# Altium PCB mega_board_version_1.PcbDoc
Units mm, origin at the board's own origin, x right, y up, seen from the top; angles counter-clockwise.
Board outline 90 x 100 mm, 2 copper layers (Top Layer, Bottom Layer); 14 components, 68 nets, 204 pads, 33 vias.
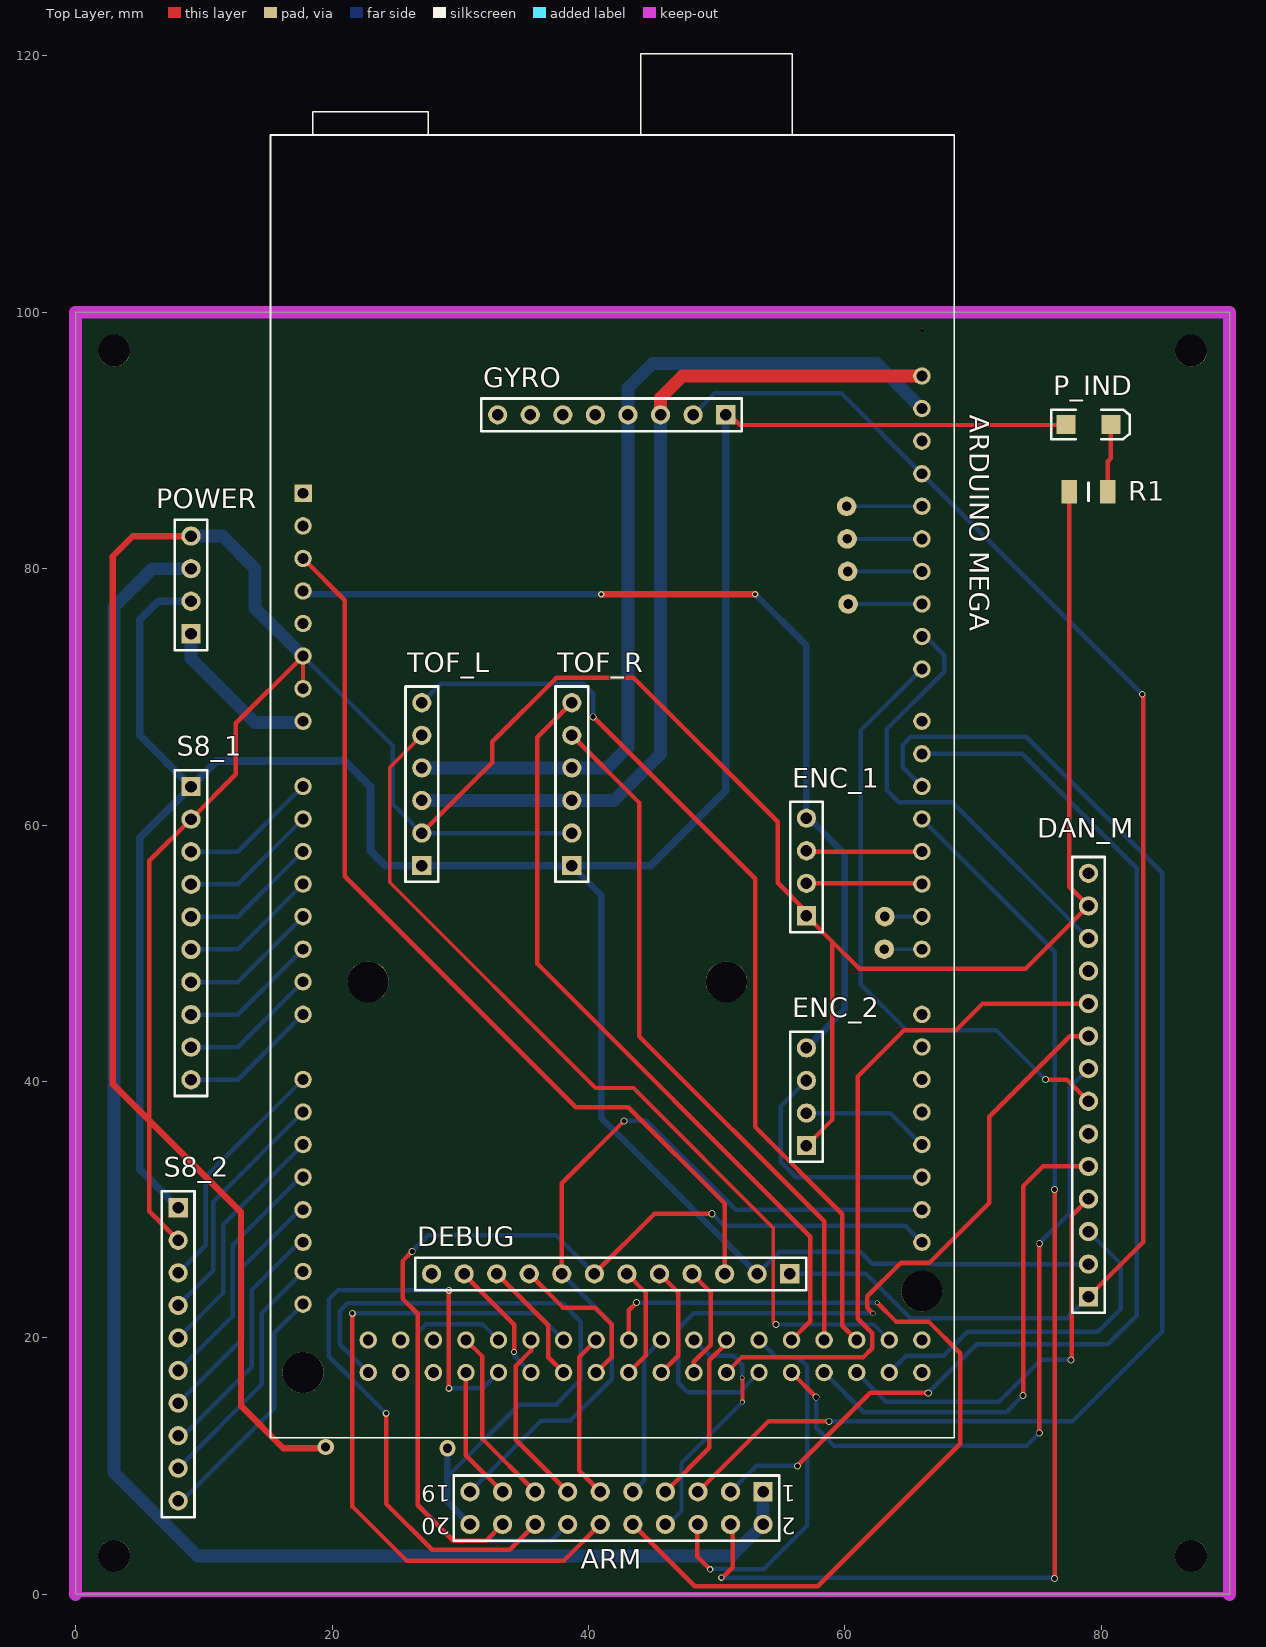
[diagram p0: Top Layer view]
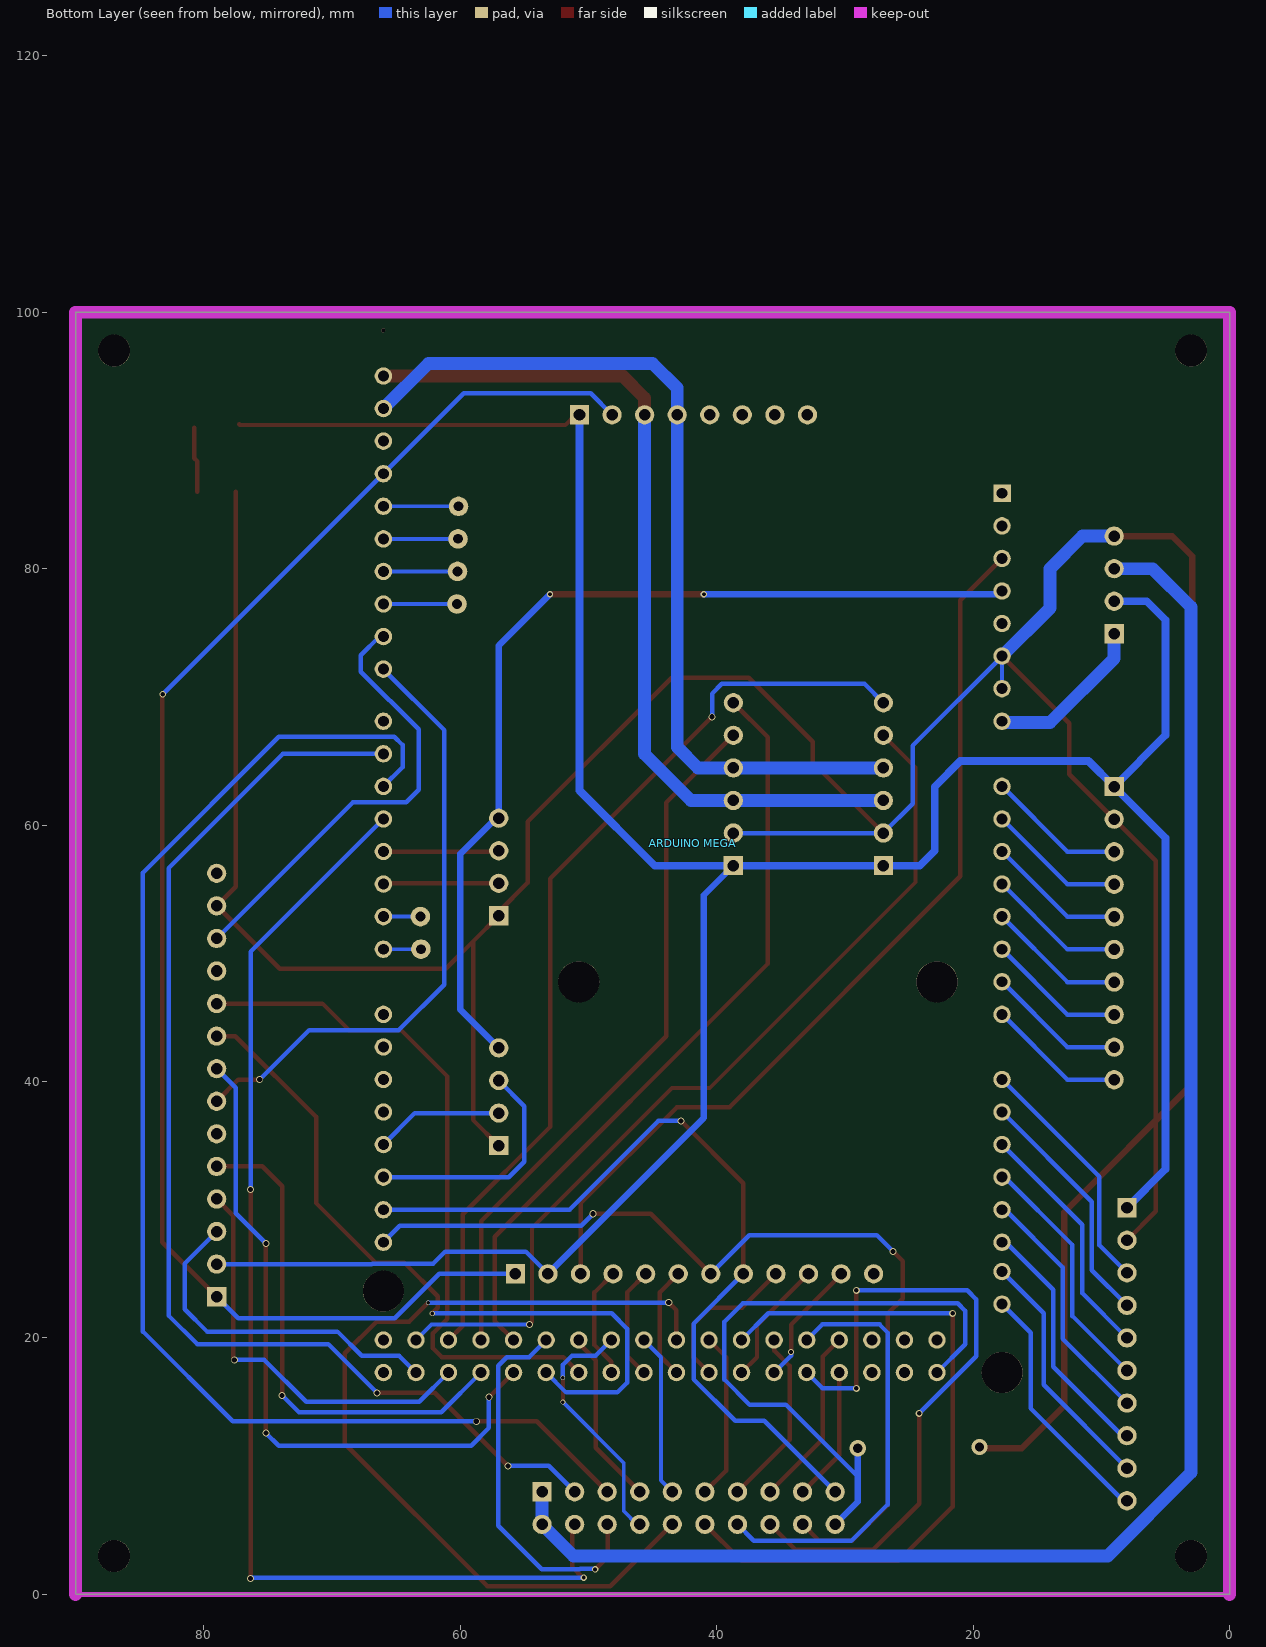
[diagram p1: Bottom Layer view, seen from below]

## Layer stack, top to bottom
Top Solder: solder mask 0.0102, Solder Resist, Dk 3.5
Top Layer: signal copper 0.0356
Dielectric 1: dielectric 0.32, FR-4, Dk 4.8
Bottom Layer: signal copper 0.0356
Bottom Solder: solder mask 0.0102, Solder Resist, Dk 3.5

## Board outline
0,0 90,0 90,100 0,100

## Design rules (kind name [scope] priority, off if disabled: settings)
Clearance [All] p1: gap=0.254 ignorepadtopadclearanceinfootprint=FALSE except(0: Arc-Hole Track-Hole SMDPad-Hole THPad-Hole Via-Hole Fill-Hole Poly-Hole Region-Hole Text-Hole; 0.35: Arc-THPad Track-THPad SMDPad-THPad THPad-THPad)
HoleSize [All] p1: absolutevalues=TRUE maxlimit=3.2 minlimit=0.025 maxpercent=80.000 minpercent=20.000
PolygonConnect [All] p1: connectstyle=Relief reliefconductorwidth=0.254 reliefentries=4 polygonreliefangle="90 Angle" airgapwidth=0.254
RoutingVias [All] p1: holewidth=0.4 width=0.55 viastyle="Through Hole" minholewidth=0.2 minwidth=0.3 maxholewidth=0.7 maxwidth=1
SolderMaskExpansion [All] p1: expansion=0.102
Width [All] p1: maxlimit=2 minlimit=0.3 preferedwidth=0.5 bottomlayer_prefwidth=0.3 minimp=50.000000 maximp=50.000000 favimp=50.000000
29 further rules are at their usual default settings.

## Components (designator, comment, footprint, x,y, rotation, side; value= is the part's Value field where it differs from the comment)
"ARDUINO MEGA" "Arduino Mega" ARDUINO_A000067 41.87,63.02 r0 bottom locked
ARM "ARM PANEL" HDR2X10 53.62,8 r180 top
DAN_M "dangaya motor controller" HDR1X14 79,23.22 r90 top
DEBUG "DEBUGGING PANEL" HDR1X12 55.7,25 r180 top
ENC_1 "ENCODER_1" HDR1X4 57,52.92 r90 top
ENC_2 "ENCODER_1" HDR1X4 57,35 r90 top
GYRO "Gyroscope" HDR1X8 50.7,92 r180 top
P_IND "LED2" 3.2X1.6X1.1 79,91.25 r0 top
POWER "POWER" HDR1X4 9,74.92 r90 top
R1 "Res3" RESC3216X75N 79,86 r180 top value=330
S8_1 "Raykha S8_1" HDR1X10 9,63 r270 top
S8_2 "Raykha S8_2" HDR1X10 8,30.16 r270 top locked
TOF_L "TOF_L" HDR1X6 27,56.84 r90 top
TOF_R "TOF_R" HDR1X6 38.7,56.84 r90 top

## Footprints (in the part's own frame and the unit in brackets; to place one, negate y for a bottom-side part, rotate by r counter-clockwise, add the part's x,y. Pads: shape width x height; smd on the part's side, far side on the other; paste and mask are expansions set on the pad)
3.2X1.6X1.1 [mm] "SMT LED; 2 Flat Leads"
  rect 1.5x1.5 smd: 1(-1.75,0) 2(1.75,0)
  silkscreen extent -2.9,-1.15 3.2,1.15
ARDUINO_A000067 [mm]
  round 1.358 hole 0.85: 0(24.13,12.7) 1(24.13,10.16) 2(24.13,7.62) 3(24.13,5.08) 3V3(-24.13,-15.24) 4(24.13,2.54) 5(24.13,0) 5V_1(-24.13,-12.7) 5V_2(24.13,43.18) 5V_3(24.13,45.72) 6(24.13,-2.54) 7(24.13,-5.08) 8(24.13,-9.144) 9(24.13,-11.684) 10(24.13,-14.224) 11(24.13,-16.764) 12(24.13,-19.304) 13(24.13,-21.844) 14(24.13,17.78) 15(24.13,20.32) 16(24.13,22.86) 17(24.13,25.4) 18(24.13,27.94) 19(24.13,30.48) 20(24.13,33.02) 21(24.13,35.56) 22(21.59,43.18) 23(21.59,45.72) 24(19.05,43.18) 25(19.05,45.72) 26(16.51,43.18) 27(16.51,45.72) 28(13.97,43.18) 29(13.97,45.72) 30(11.43,43.18) 31(11.43,45.72) 32(8.89,43.18) 33(8.89,45.72) 34(6.35,43.18) 35(6.35,45.72) 36(3.81,43.18) 37(3.81,45.72) 38(1.27,43.18) 39(1.27,45.72) 40(-1.27,43.18) 41(-1.27,45.72) 42(-3.81,43.18) 43(-3.81,45.72) 44(-6.35,43.18) 45(-6.35,45.72) 46(-8.89,43.18) 47(-8.89,45.72) 48(-11.43,43.18) 49(-11.43,45.72) 50(-13.97,43.18) 51(-13.97,45.72) 52(-16.51,43.18) 53(-16.51,45.72) AD0(-24.13,0) AD1(-24.13,2.54) AD2(-24.13,5.08) AD3(-24.13,7.62) AD4(-24.13,10.16) AD5(-24.13,12.7) AD6(-24.13,15.24) AD7(-24.13,17.78) AD8(-24.13,22.86) AD9(-24.13,25.4) AD10(-24.13,27.94) AD11(-24.13,30.48) AD12(-24.13,33.02) AD13(-24.13,35.56) AD14(-24.13,37.846) AD15(-24.13,40.386) AREF(24.13,-26.924) GND1(-24.13,-10.16) GND2(-24.13,-7.62) GND3(24.13,-24.384) GND4(-19.05,43.18) GND5(-19.05,45.72) IOREF(-24.13,-20.32) RESET(-24.13,-17.78) SCL(24.13,-32.004) SDA(24.13,-29.464) VIN(-24.13,-5.08)
  rect 1.358x1.358 hole 0.85: NC(-24.13,-22.86)
  round 0.3 hole 0.3 unplated: ""(-24.13,-36.83) ""(24.13,-35.56)
  round 3.2 hole 3.2 unplated: ""(-24.13,45.72) ""(-19.05,15.24) ""(8.89,15.24) ""(24.13,39.37)
HDR1X4 [mm] "Connector; Header; 4 Position"
  rect 1.5x1.5 hole 0.9: 1(0,0)
  round 1.5 hole 0.9: 2(2.54,0) 3(5.08,0) 4(7.62,0)
  silkscreen extent -1.27,-1.27 8.89,1.27
HDR1X6 [mm] "Connector; Header; 6 Position"
  rect 1.5x1.5 hole 0.9: 1(0,0)
  round 1.5 hole 0.9: 2(2.54,0) 3(5.08,0) 4(7.62,0) 5(10.16,0) 6(12.7,0)
  silkscreen extent -1.27,-1.27 13.97,1.27
HDR1X8 [mm] "Connector; Header; 8 Position"
  rect 1.5x1.5 hole 0.9: 1(0,0)
  round 1.5 hole 0.9: 2(2.54,0) 3(5.08,0) 4(7.62,0) 5(10.16,0) 6(12.7,0) 7(15.24,0) 8(17.78,0)
  silkscreen extent -1.27,-1.27 19.05,1.27
HDR1X10 [mm] "Connector; Header; 10 Position"
  rect 1.5x1.5 hole 0.9: 1(0,0)
  round 1.5 hole 0.9: 2(2.54,0) 3(5.08,0) 4(7.62,0) 5(10.16,0) 6(12.7,0) 7(15.24,0) 8(17.78,0) 9(20.32,0) 10(22.86,0)
  silkscreen extent -1.27,-1.27 24.13,1.27
HDR1X12 [mm] "Connector; Header; 12 Position"
  rect 1.5x1.5 hole 0.9: 1(0,0)
  round 1.5 hole 0.9: 2(2.54,0) 3(5.08,0) 4(7.62,0) 5(10.16,0) 6(12.7,0) 7(15.24,0) 8(17.78,0) 9(20.32,0) 10(22.86,0) 11(25.4,0) 12(27.94,0)
  silkscreen extent -1.27,-1.27 29.21,1.27
HDR1X14 [mm] "Connector; Header; 14 Position"
  rect 1.5x1.5 hole 0.9: 1(0,0)
  round 1.5 hole 0.9: 2(2.54,0) 3(5.08,0) 4(7.62,0) 5(10.16,0) 6(12.7,0) 7(15.24,0) 8(17.78,0) 9(20.32,0) 10(22.86,0) 11(25.4,0) 12(27.94,0) 13(30.48,0) 14(33.02,0)
  silkscreen extent -1.27,-1.27 34.29,1.27
HDR2X10 [mm] "Connector; Header; 10x2 Position"
  rect 1.5x1.5 hole 0.9: 1(0,0)
  round 1.5 hole 0.9: 2(0,2.54) 3(2.54,0) 4(2.54,2.54) 5(5.08,0) 6(5.08,2.54) 7(7.62,0) 8(7.62,2.54) 9(10.16,0) 10(10.16,2.54) 11(12.7,0) 12(12.7,2.54) 13(15.24,0) 14(15.24,2.54) 15(17.78,0) 16(17.78,2.54) 17(20.32,0) 18(20.32,2.54) 19(22.86,0) 20(22.86,2.54)
  silkscreen extent -1.27,-1.27 24.13,3.81
RESC3216X75N [mm]
  rect 1.2x1.8 smd: 1(-1.5,0) 2(1.5,0)
  silkscreen extent 0,-0.7 0,0.7, body extent -1.6,-0.8 1.6,0.8, height 0.75

## Part data
"ARDUINO MEGA": library part A000067, "ATmega2560 Arduino Mega2560 AVR® ATmega AVR MCU 8-Bit Embedded Evaluation Board", Package=None, Availability=Unavailable, MF=Arduino, MP=A000067, Price=None, SnapEDA_Link=https://www.snapeda.com/parts/A000067/Arduino/view-part/557398/?ref=snap
ARM: library part "Header 20", "Header, 20-Pin", LatestRevisionDate=17-Jul-2002, LatestRevisionNote="Re-released for DXP Platform.", Publisher="Altium Limited"
DAN_M: library part "Header 14", "Header, 14-Pin", LatestRevisionDate=17-Jul-2002, LatestRevisionNote="Re-released for DXP Platform.", Publisher="Altium Limited"
DEBUG: library part "Header 12", "Header, 12-Pin", LatestRevisionDate=17-Jul-2002, LatestRevisionNote="Re-released for DXP Platform.", Publisher="Altium Limited"
ENC_1 ENC_2 POWER: library part "Header 4", "Header, 4-Pin", LatestRevisionDate=17-Jul-2002, LatestRevisionNote="Re-released for DXP Platform.", Publisher="Altium Limited"
GYRO: library part "Header 8", "Header, 8-Pin", LatestRevisionDate=17-Jul-2002, LatestRevisionNote="Re-released for DXP Platform.", Publisher="Altium Limited"
P_IND: "Typical RED, GREEN, YELLOW, AMBER GaAs LED", LatestRevisionDate=17-Jul-2002, LatestRevisionNote="Re-released for DXP Platform.", PackageDescription="SM LED; 2 Flat Leads", PackageReference=3.2X1.6X1.1, PackageVersion=Feb-2002, Published=8-Jun-2000, Publisher="Altium Limited"
R1: "Resistor", LatestRevisionDate=29-May-2009, LatestRevisionNote="IPC-7351 Footprint Added.", PackageDescription="Chip Resistor", PackageReference=J1-0603, Published=8-Jun-2000, Publisher="Altium Limited"
S8_1 S8_2: library part "Header 10", "Header, 10-Pin", LatestRevisionDate=17-Jul-2002, LatestRevisionNote="Re-released for DXP Platform.", Publisher="Altium Limited"
TOF_L TOF_R: library part "Header 6", "Header, 6-Pin", LatestRevisionDate=17-Jul-2002, LatestRevisionNote="Re-released for DXP Platform.", Publisher="Altium Limited"

## Free pads (board coordinates)
  round 2.5 hole 2.5: 2(3,3) 3(87,3) 4(87,97) 5(3,97)
  round 1.524 hole 0.762: 12(60.136,84.864) 13(60.176,82.324) 14(60.216,79.784) 15(60.256,77.244) 16(63.11,52.86) 17(63.07,50.32)

## Via types
v1: diameter 0.55, hole 0.4, Top Layer to Bottom Layer, 17 vias
v2: diameter 0.5, hole 0.3, Top Layer to Bottom Layer, 4 vias
v3: diameter 0.55, hole 0.35, Top Layer to Bottom Layer, 4 vias
v4: diameter 1.27, hole 0.711, Top Layer to Bottom Layer, 2 vias
v5: diameter 0.34, hole 0.27, Top Layer to Bottom Layer, 1 vias
v6: diameter 0.4, hole 0.3, Top Layer to Bottom Layer, 1 vias
v7: diameter 0.45, hole 0.3, Top Layer to Bottom Layer, 1 vias
v8: diameter 0.5, hole 0.35, Top Layer to Bottom Layer, 1 vias
v9: diameter 0.4, hole 0.27, Top Layer to Bottom Layer, 1 vias
v10: diameter 0.35, hole 0.27, Top Layer to Bottom Layer, 1 vias

## Nets (pads, with @x,y where several pads share a name; then routed paths per layer and width w, separated by ;. In a path a pad name is that pad's centre, name@x,y a point inside that pad or via, vN(x,y) a via of type N, cw(c..) or ccw(c..) an arc to the next point about the centre after c; other vN are vias at no path point)
3V3: "ARDUINO MEGA.3V3" ENC_1.4 ENC_2.4 | length 87
  Top Layer w0.35: v2(41,78) v2(53,78)
  Top Layer w0.5: v2(41,78) v2(53,78)
  Bottom Layer w0.35: 17.74,78.26 18,78
  Bottom Layer w0.5: 18,78 v2(41,78) ; v2(53,78) 57,74 ENC_1.4 57.21,60.54 60,57.75 60,45.62 ENC_2.4
5V: DAN_M.2 DEBUG.2 GYRO.1 P_IND.1 POWER.2 S8_1.1 S8_2.1 TOF_L.1 TOF_R.1 | length 227.2
  Top Layer w0.35: GYRO.1 51,92 51.795,91.205 77.205,91.205 P_IND.1
  Bottom Layer w0.35: DEBUG.2 54.874,26.714 61.186,26.714 62.125,25.775 66.88,25.775 66.895,25.76 DAN_M.2
  Bottom Layer w0.5: TOF_R.1 41,54.54 41,37.16 42,36.16 DEBUG.2
  Bottom Layer w0.6: S8_2.1 5,33.16 5,59 S8_1.1 ; POWER.2 6.46,77.46 5,76 5,67 S8_1.1 ; GYRO.1 50.7,62.7 44.84,56.84 42,56.84 32,56.84 29.16,56.84 TOF_L.1 24.16,56.84 23,58 23,63 21,65 11,65 S8_1.1
5V(S): ARM.1 ARM.2 POWER.3 | length 131.6
  Bottom Layer w1: POWER.3 6,80 3,77 3,9.5 9.5,3 51.16,3 ARM.2 ARM.1
5V_1: "ARDUINO MEGA.5V_1"
9V: "ARDUINO MEGA.VIN" POWER.1 | length 12.8
  Bottom Layer w0.35: 17.64,68 17.74,68 17.74,68.1
  Bottom Layer w1: POWER.1 9,73 14,68 17.64,68
AD0: "ARDUINO MEGA.AD0" S8_1.3 | length 10.9
  Bottom Layer w0.35: S8_1.3 12.64,57.92 17.74,63.02
AD1: "ARDUINO MEGA.AD1" S8_1.4 | length 10.9
  Bottom Layer w0.35: S8_1.4 12.64,55.38 17.74,60.48
AD2: "ARDUINO MEGA.AD2" S8_1.5 | length 10.9
  Bottom Layer w0.35: S8_1.5 12.64,52.84 17.74,57.94
AD3: "ARDUINO MEGA.AD3" S8_1.6 | length 10.9
  Bottom Layer w0.35: S8_1.6 12.64,50.3 17.74,55.4
AD4: "ARDUINO MEGA.AD4" S8_1.7 | length 10.9
  Bottom Layer w0.35: S8_1.7 12.64,47.76 17.74,52.86
AD5: "ARDUINO MEGA.AD5" S8_1.8 | length 10.9
  Bottom Layer w0.35: S8_1.8 12.64,45.22 17.74,50.32
AD6: "ARDUINO MEGA.AD6" S8_1.9 | length 10.9
  Bottom Layer w0.35: S8_1.9 12.64,42.68 17.74,47.78
AD7: "ARDUINO MEGA.AD7" S8_1.10 | length 10.9
  Bottom Layer w0.35: S8_1.10 12.64,40.14 17.74,45.24
AD8: "ARDUINO MEGA.AD8" S8_2.3 | length 19.1
  Bottom Layer w0.35: S8_2.3 10.146,27.226 10.146,32.566 17.74,40.16
AD9: "ARDUINO MEGA.AD9" S8_2.4 | length 19.1
  Bottom Layer w0.35: S8_2.4 10.75,25.29 10.75,30.63 17.74,37.62
AD10: "ARDUINO MEGA.AD10" S8_2.5 | length 19.1
  Bottom Layer w0.35: S8_2.5 11.5,23.5 11.5,28.84 17.74,35.08
AD11: "ARDUINO MEGA.AD11" S8_2.6 | length 19.2
  Bottom Layer w0.35: S8_2.6 12.25,21.71 12.25,27.25 17.54,32.54 17.74,32.54
AD12: "ARDUINO MEGA.AD12" S8_2.7 | length 19.3
  Bottom Layer w0.35: S8_2.7 13,19.92 13,25.5 17.5,30 17.74,30
AD13: "ARDUINO MEGA.AD13" S8_2.8 | length 19.5
  Bottom Layer w0.35: S8_2.8 8.38,12.38 13.75,17.75 13.75,23.75 17.46,27.46 17.74,27.46
AD14: "ARDUINO MEGA.AD14" S8_2.9 | length 19.4
  Bottom Layer w0.35: S8_2.9 14.5,16.34 14.5,21.934 17.74,25.174
AD15: "ARDUINO MEGA.AD15" S8_2.10 | length 19.5
  Bottom Layer w0.35: S8_2.10 8.3,7.3 15.5,14.5 15.5,20.394 17.74,22.634
BUTTON_1: "ARDUINO MEGA.41" DEBUG.9 | length 12.3
  Top Layer w0.35: DEBUG.9 38.009,22.371 40.49,22.371 41.811,21.05 41.811,18.511 40.6,17.3
BUTTON_2: "ARDUINO MEGA.43" DEBUG.10 | length 9.9
  Top Layer w0.35: DEBUG.10 36.856,20.984 36.856,18.504 38.06,17.3
BUTTON_3: "ARDUINO MEGA.45" DEBUG.11 | length 9.9
  Top Layer w0.35: DEBUG.11 30.3,24.933 34.2,21.033 v7(34.2,18.9)
  Bottom Layer w0.35: v7(34.2,18.9) 34.2,18.62 35.52,17.3
ECA_1: "ARDUINO MEGA.2" ENC_1.2 | length 9
  Top Layer w0.35: ENC_1.2 65.94,55.46 66,55.4
ECA_2: "ARDUINO MEGA.3" ENC_1.3 | length 9.1
  Top Layer w0.35: ENC_1.3 57,57.931 65.991,57.931 66,57.94
ECB_1: "ARDUINO MEGA.18" ENC_2.2 | length 10
  Bottom Layer w0.35: ENC_2.2 63.54,37.54 66,35.08
ECB_2: "ARDUINO MEGA.19" ENC_2.3 | length 18.7
  Bottom Layer w0.35: ENC_2.3 55,38.08 55,33.75 56.21,32.54 66,32.54
EN1: "ARDUINO MEGA.27" DAN_M.5 | length 39.4
  Top Layer w0.35: v1(73.891,15.513) 73.891,31.82 75.451,33.38 DAN_M.5
  Bottom Layer w0.35: 58.38,17.3 61.48,14.2 72.578,14.2 v1(73.891,15.513)
EN2: "ARDUINO MEGA.33" DAN_M.10 | length 54.2
  Top Layer w0.35: 50.76,17.3 51.97,18.51 61.445,18.51 62.131,19.196 62.131,20.364 61,21.495 61,40.392 64.62,44.012 68.682,44.012 70.75,46.08 DAN_M.10
GND: "ARDUINO MEGA.GND1" "ARDUINO MEGA.GND2" DAN_M.13 ENC_1.1 ENC_2.1 POWER.4 R1.2 S8_1.2 S8_2.2 TOF_L.2 TOF_R.2 | length 307.3
  Top Layer w0.3: 17.74,70.64 17.74,73.18
  Top Layer w0.35: S8_2.2 5.75,29.87 5.75,57.21 S8_1.2 12.5,63.96 12.5,67.94 17.74,73.18 ; TOF_L.2 32.5,64.88 32.5,66.5 37.5,71.5 43.507,71.5 54.75,60.257 54.75,55.5 57,53.25 ENC_1.1 59,50.92 ; ENC_2.1 59,37 59,50.92 ; R1.2 77.5,55.2 DAN_M.13 74.087,48.787 61.133,48.787 59,50.92
  Top Layer w0.5: POWER.4 4.46,82.54 2.9,80.98 2.9,39.8 12.9,29.8 12.9,14.7 16.2,11.4 v4@19.3,11.4
  Bottom Layer w0.3: 17.74,70.64 17.74,73.18
  Bottom Layer w0.35: 17.74,73.18 24.717,66.203 24.717,61.663 TOF_L.2 TOF_R.2
  Bottom Layer w1: POWER.4 11.46,82.54 14,80 14,76.92 17.74,73.18
  other v4: 19.5,11.5
GND_3: "ARDUINO MEGA.GND3" DAN_M.1 DEBUG.1 GYRO.2 | length 119.4
  Top Layer w0.35: DAN_M.1 83.25,27.47 v8@83.25,70
  Bottom Layer w0.35: GYRO.2 49.829,93.669 59.735,93.669 66,87.404 v8(83.202,70.202) ; DEBUG.1 61.645,25 65.12,21.525 77.305,21.525 DAN_M.1
GND_5: "ARDUINO MEGA.GND5" ARM.20 | length 50.1
  Bottom Layer w0.35: 22.82,17.3 20.604,19.516 20.604,22.104 21.201,22.701 37.95,22.701 39.396,21.255 39.396,16.756 37.44,14.8 34.6,14.8 29,9.2
  Bottom Layer w0.5: v4(29,11.4) 29,9.2 29,7.22 ARM.20
IN_G: GYRO.8
INA1: "ARDUINO MEGA.23" DAN_M.3 | length 27.2
  Bottom Layer w0.35: 63.46,17.3 64.772,18.612 67.693,18.612 69.582,20.5 79.75,20.5 81.5,22.25 81.5,25.8 DAN_M.3
INA2: "ARDUINO MEGA.29" DAN_M.8 | length 53.5
  Top Layer w0.35: 55.84,17.3 v1(57.762,15.378) ; v1(75.161,12.592) v1(75.161,27.375)
  Bottom Layer w0.35: v1(57.762,15.378) 57.762,12.988 59.15,11.6 74.169,11.6 v1(75.161,12.592) ; v1(75.161,27.375) 77.523,29.737 77.523,39.523 DAN_M.8
INB1: "ARDUINO MEGA.25" DAN_M.4 | length 32.1
  Top Layer w0.35: v1(77.625,18.282) 77.701,18.358 77.701,29.541 DAN_M.4
  Bottom Layer w0.35: 60.92,17.3 63.208,15.012 72.012,15.012 75.282,18.282 v1(77.625,18.282)
INB2: "ARDUINO MEGA.31" DAN_M.9 | length 58.3
  Top Layer w0.35: v6(62.182,21.914) 61.75,22.345 61.75,23.248 64.353,25.851 66.576,25.851 71.25,30.525 71.25,37.25 77.54,43.54 DAN_M.9
  Bottom Layer w0.35: 53.3,17.3 51.75,15.75 47.75,15.75 46.992,16.508 46.992,20.72 48.186,21.914 v6(62.182,21.914)
NetP_IND_2: P_IND.2 R1.1 | length 5.1
  Top Layer w0.35: R1.1 80.5,88.36 80.75,88.61 P_IND.2@80.75,91
OUT_1: "ARDUINO MEGA.38" ARM.10 | length 69.3
  Top Layer w0.35: 43.14,19.84 43.14,22.151 v1(43.741,22.752) ; ARM.10 48.291,0.629 57.879,0.629 69,11.75 69,18.804 66.525,21.279 63.985,21.279 v5(62.512,22.752)
  Bottom Layer w0.35: v1(43.741,22.752) v5(62.512,22.752)
OUT_2: "ARDUINO MEGA.48" ARM.15 | length 14.1
  Top Layer w0.35: 30.44,19.84 31.727,18.553 31.727,12.113 ARM.15
PWM1: "ARDUINO MEGA.8" DAN_M.7 | length 48.1
  Top Layer w0.35: v1(75.644,40.151) 77.309,40.151 DAN_M.7
  Bottom Layer w0.35: 66,72.164 61.25,67.414 61.25,47.56 64.798,44.012 71.783,44.012 v1(75.644,40.151)
PWM2: "ARDUINO MEGA.9" DAN_M.12 | length 35.3
  Bottom Layer w0.35: 66,74.704 66.296,74.704 67.75,73.25 67.75,71.963 63.25,67.463 63.25,62.75 64.208,61.792 68.368,61.792 DAN_M.12
RESET: "ARDUINO MEGA.RESET" DEBUG.3 | length 71.8
  Top Layer w0.35: 17.74,80.8 21,77.54 21,56 39,38 43.1,38 50.62,30.48 DEBUG.3
RGB_B: "ARDUINO MEGA.39" DEBUG.6 | length 8.8
  Top Layer w0.35: DEBUG.6 44.452,23.548 44.452,18.612 43.14,17.3
RGB_G: "ARDUINO MEGA.37" DEBUG.5 | length 8.8
  Top Layer w0.35: DEBUG.5 46.992,23.548 46.992,18.612 45.68,17.3
RGB_R: "ARDUINO MEGA.35" DEBUG.4 | length 8.8
  Top Layer w0.35: DEBUG.4 49.532,23.548 49.532,19.45 48.22,18.137 48.22,17.3
S0_1: "ARDUINO MEGA.30" ARM.6 | length 30
  Top Layer w0.35: ARM.6@48.5,5.46 48.5,2.931 v2(49.482,1.949)
  Bottom Layer w0.35: v2(49.482,1.949) 49.519,1.987 50.652,1.987 50.689,1.949 53.653,1.949 57.044,5.341 57.044,17.825 56.365,18.504 54.636,18.504 53.3,19.84
S0_2: "ARDUINO MEGA.40" ARM.11 | length 13.1
  Top Layer w0.35: 40.6,19.84 39.271,18.511 39.271,9.649 ARM.11
S1_1: "ARDUINO MEGA.32" ARM.7 | length 13.8
  Top Layer w0.35: ARM.7 49.424,11.424 49.424,18.259 50.76,19.595 50.76,19.84
S1_2: "ARDUINO MEGA.42" ARM.12 | length 54.6
  Top Layer w0.35: v3(21.592,21.914) 21.592,6.852 25.809,2.635 38.095,2.635 ARM.12
  Bottom Layer w0.35: v3(21.592,21.914) 35.986,21.914 38.06,19.84
S2_1: "ARDUINO MEGA.34" ARM.8 | length 19.6
  Top Layer w0.3: v9(52,15) 52.022,15.022 52,15.043 v10(52,16.9)
  Bottom Layer w0.3: ARM.8 46.21,5.46 47.25,6.5 47.25,10.25 v9(52,15)
  Bottom Layer w0.35: 48.22,19.84 49.448,18.612 51.285,18.612 52,17.897 v10(52,16.9)
S2_2: "ARDUINO MEGA.44" ARM.13 | length 14
  Top Layer w0.35: 35.52,19.84 35.52,19.02 34.316,17.816 34.316,12.064 ARM.13
S3_1: "ARDUINO MEGA.36" ARM.9 | length 12.8
  Bottom Layer w0.35: ARM.9 44.344,8.884 44.344,18.504 45.68,19.84
S3_2: "ARDUINO MEGA.46" ARM.14 | length 33.9
  Bottom Layer w0.35: 32.98,19.84 31.77,21.05 27.3,21.05 26.672,20.422 26.672,7.004 29.492,4.185 37.105,4.185 ARM.14
SCL: "ARDUINO MEGA.SCL" GYRO.3 TOF_L.3 TOF_R.3 | length 69
  Top Layer w0.35: GYRO.3 GYRO.3@45.62,92.62
  Top Layer w1: GYRO.3@45.62,92.62 45.62,93.32 47.324,95.024 66,95.024
  Bottom Layer w1: TOF_L.3 32,61.92 42,61.92 45.62,65.54 GYRO.3
SCL_1: "ARDUINO MEGA.21" ARM.18 DEBUG.7 | length 73.3
  Top Layer w0.35: v1(26.25,26.75) 25.5,26 25.5,23.061 26.672,21.888 26.672,6.953 29.441,4.185 32.025,4.185 ARM.18 ; DEBUG.7 45.146,29.686 v1(49.634,29.686)
  Bottom Layer w0.35: v1(26.25,26.75) 27.5,28 37.46,28 DEBUG.7 ; v1(49.634,29.686) 50.57,28.75 64.71,28.75 66,27.46
SDA: "ARDUINO MEGA.SDA" GYRO.4 TOF_L.4 TOF_R.4 | length 69.9
  Bottom Layer w1: TOF_L.4 TOF_R.4 41.46,64.46 43.08,66.08 GYRO.4 43.08,94.08 45,96 62.484,96 66,92.484
SDA_1: "ARDUINO MEGA.20" ARM.19 DEBUG.8 | length 64.5
  Top Layer w0.35: DEBUG.8 37.92,32.069 v1(42.776,36.925)
  Bottom Layer w0.35: ARM.19 36.292,13.532 38.56,13.532 41.804,16.776 41.804,21.116 DEBUG.8 ; v1(42.776,36.925) 44.554,36.925 51.479,30 66,30
SIGNAL_1: "ARDUINO MEGA.4" ARM.4 | length 94.2
  Top Layer w0.35: v2(50.371,1.308) 50.44,1.308 51.25,2.118 51.25,5.29 ARM.4 ; v1(76.355,1.238) v1(76.355,31.566)
  Bottom Layer w0.35: v2(50.371,1.308) 76.285,1.308 v1(76.355,1.238) ; 66,60.48 76.355,50.125 v1(76.355,31.566)
SIGNAL_2: "ARDUINO MEGA.5" ARM.5 | length 105.9
  Top Layer w0.35: ARM.5 54.04,13.5 v1(58.75,13.5)
  Bottom Layer w0.35: v1(58.75,13.5) 77.75,13.5 84.75,20.5 84.75,56.292 74.146,66.896 65.146,66.896 64.5,66.25 64.5,64.52 66,63.02
ULTRA_1: "ARDUINO MEGA.47" ARM.16 | length 53.7
  Top Layer w0.35: v3(24.209,14.116) 24.209,7.08 27.815,3.473 33.853,3.473 ARM.16 ; v3(29.111,16.072) v3(29.111,23.717) ; 32.743,17.063 32.98,17.3
  Bottom Layer w0.35: v3(24.209,14.116) 19.75,18.575 19.75,23 20.467,23.717 v3(29.111,23.717) ; v3(29.111,16.072) 31.752,16.072 32.98,17.3
ULTRA_2: "ARDUINO MEGA.49" ARM.17 | length 10.5
  Top Layer w0.35: 30.44,17.3 30.44,10.86 ARM.17
X_FRONT: "ARDUINO MEGA.6" ARM.3 | length 92.7
  Top Layer w0.35: v1(56.289,10.027) 61.978,15.716 v1(66.5,15.716)
  Bottom Layer w0.35: ARM.3 53.107,10.027 v1(56.289,10.027) ; 66,65.56 73.831,65.56 82.75,56.641 82.75,21.75 80.5,19.5 70.283,19.5 v1(66.5,15.716)
X_LB: "ARDUINO MEGA.24" TOF_L.6 | length 73.2
  Top Layer w0.35: v1(40.363,68.447) 53,55.81 53,36.455 59.8,29.655 59.8,20.96 60.92,19.84
  Bottom Layer w0.35: TOF_L.6 28.472,71.012 39.601,71.012 40.363,70.25 v1(40.363,68.447)
X_LF: "ARDUINO MEGA.22" TOF_L.5 | length 70.5
  Top Layer w0.3: TOF_L.5 24.5,64.5 24.5,55.543 40.543,39.5 43.5,39.5 54.414,28.586 54.414,21.249 v1(54.612,21.05)
  Bottom Layer w0.3: v1(54.612,21.05) 62.25,21.05 63.46,19.84
X_RB: "ARDUINO MEGA.28" TOF_R.6 | length 60.2
  Top Layer w0.35: TOF_R.6 36,66.84 36,49.2 57.3,27.9 57.3,21.3 55.84,19.84
X_RF: "ARDUINO MEGA.26" TOF_R.5 | length 55.3
  Top Layer w0.35: TOF_R.5 43.944,61.756 43.944,43.529 58.38,29.094 58.38,19.84
pads on no net: "ARDUINO MEGA.0" "ARDUINO MEGA.1" "ARDUINO MEGA.5V_2" "ARDUINO MEGA.5V_3" "ARDUINO MEGA.7" "ARDUINO MEGA.10" "ARDUINO MEGA.11" "ARDUINO MEGA.12" "ARDUINO MEGA.13" "ARDUINO MEGA.14" "ARDUINO MEGA.15" "ARDUINO MEGA.16" "ARDUINO MEGA.17" "ARDUINO MEGA.50" "ARDUINO MEGA.51" "ARDUINO MEGA.52" "ARDUINO MEGA.53" "ARDUINO MEGA." "ARDUINO MEGA.AREF" "ARDUINO MEGA.GND4" "ARDUINO MEGA.IOREF" "ARDUINO MEGA.NC" DAN_M.6 DAN_M.11 DAN_M.14 DEBUG.12 GYRO.5 GYRO.6 GYRO.7
copper on no net: | length 29
  Bottom Layer w0.3: 60.136,84.864 66,84.864 ; 60.176,82.324 66,82.324 ; 60.216,79.784 66,79.784 ; 60.256,77.244 66,77.244 ; 63.07,50.32 66,50.32 ; 63.11,52.86 66,52.86

## Keep-outs
Keep-Out Layer:
  the board outline again, w0.4

## Text inside footprints (layer, text, board x,y; h text height)
ARM: Top Overlay "2" at 56.16,5.968 h1.27 r180; Top Overlay "1" at 56.16,8.508 h1.27 r180; Top Overlay "19" at 29.236,8.508 h1.27 r180; Top Overlay "20" at 29.236,5.968 h1.27 r180